# Allegro board route2.brd
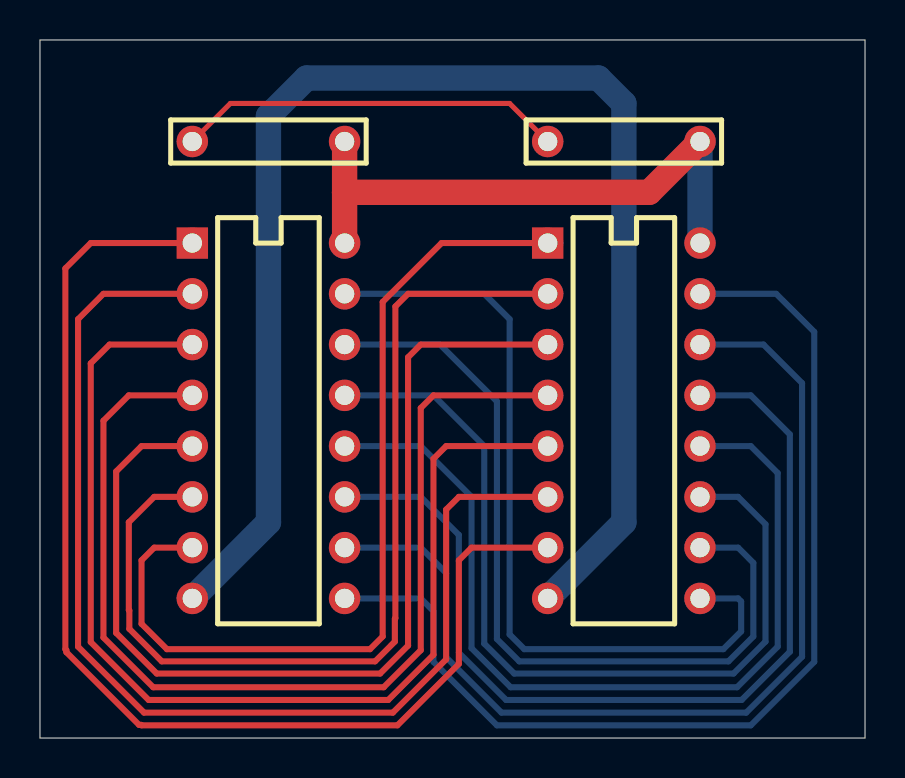
[diagram p0: board, top side]
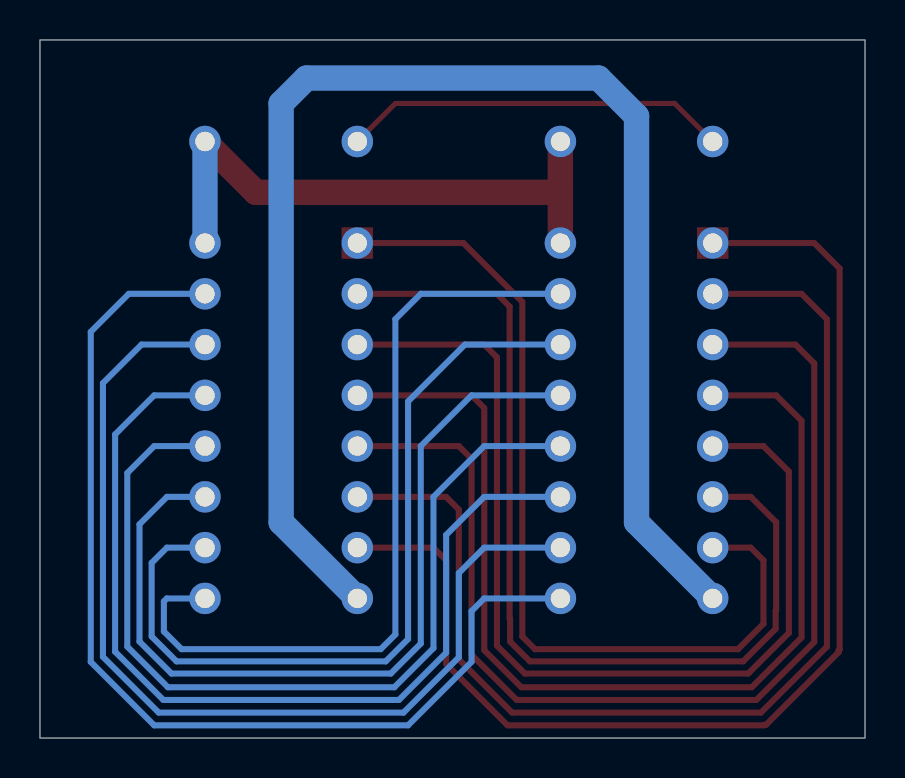
[diagram p1: board, bottom side, seen from below]

Outline 41.27 x 34.93 mm; copper layers: TOP, GND, POWER, INNER1, INNER2, BOTTOM. Coordinates in mm from the lower left corner of the outline.
Outline path: 0,34.93 41.27,34.93 41.27,0 0,0 0,34.93

## Design rules (mm)
nets with their own width: min track width 0.254; nets GND_SIGNAL
nets with their own width: min track width 0.305; nets N01899 N01900 N01901 N01902 N01903 N01904 N01905 N01906 N01907 N01908 N01909 N01910 N01911 N01912
nets with their own width: min track width 1.27; nets GND VCC

## Placement (name value [footprint] x y rotation side)
C1  CAP NP  [AC300100A]  15.24 29.85 180 top
C2  CAP NP  [AC300100A]  33.02 29.85 180 top
U1  74LS158  [DIP16]  7.62 24.77 270 top
U2  74LS158  [DIP16]  25.4 24.77 270 top

## Library data of the parts
C1 C2 = CAP_NP
U1 U2 = 74LS158

## Footprints (pads in the part's own frame, mm; a bottom-side part is the same pattern mirrored in y, then rotated)
AC300100A
  round 1.575 hole 0.965: 1(0,0) 2(7.62,0)
DIP16
  rect 1.575x1.575 hole 0.965: 1(0,0)
  round 1.575 hole 0.965: 2(2.54,0) 3(5.08,0) 4(7.62,0) 5(10.16,0) 6(12.7,0) 7(15.24,0) 8(17.78,0) 9(17.78,7.62) 10(15.24,7.62) 11(12.7,7.62) 12(10.16,7.62) 13(7.62,7.62) 14(5.08,7.62) 15(2.54,7.62) 16(0,7.62)

## Nets
GND: U1.8(TP-8) U2.8(TP-8)
GND_SIGNAL: C1.2(TP-2) C2.2(TP-2)
VCC: C1.1(TP-1) C2.1(TP-1) U1.16(TP-16) U2.16(TP-16)
N01899: U1.2(TP-2) U2.6(TP-6)
N01900: U1.3(TP-3) U2.5(TP-5)
N01901: U1.4(TP-4) U2.4(TP-4)
N01902: U1.5(TP-5) U2.3(TP-3)
N01903: U1.6(TP-6) U2.2(TP-2)
N01904: U1.7(TP-7) U2.1(TP-1)
N01905: U1.9(TP-9) U2.15(TP-15)
N01906: U1.10(TP-10) U2.14(TP-14)
N01907: U1.11(TP-11) U2.13(TP-13)
N01908: U1.12(TP-12) U2.12(TP-12)
N01909: U1.14(TP-14) U2.10(TP-10)
N01910: U1.1(TP-1) U2.7(TP-7)
N01911: U1.13(TP-13) U2.11(TP-11)
N01912: U1.15(TP-15) U2.9(TP-9)

## Routing (per net, layer and track width the routed paths; a pad name or vN(x,y) marks a point on that pad's centre or on a via; arc(x,y) is an arc through that point)
GND: length 71.1
  BOTTOM w1.27: U1.8 11.43,10.8 11.43,31.11 13.34,33.02 27.94,33.02 29.21,31.75 29.21,10.8 U2.8
GND_SIGNAL: length 19.4
  TOP w0.254: C1.2 9.53,31.75 23.5,31.75 C2.2
VCC: length 29
  TOP w1.27: C1.1 15.24,27.3 ; 15.24,27.3 30.48,27.3 C2.1 ; 15.24,27.3 U1.16
  BOTTOM w1.27: C2.1 U2.16
N01899: length 56.3
  TOP w0.305: U2.6 20.95,12.07 20.32,11.43 20.32,3.94 17.65,1.27 5.21,1.27 1.91,4.57 1.91,20.95 3.17,22.22 U1.2
N01900: length 54.5
  TOP w0.305: U1.3 3.48,19.68 2.54,18.75 2.54,4.8 5.44,1.91 17.42,1.91 19.68,4.17 19.68,13.97 20.32,14.61 U2.5
N01901: length 52.2
  TOP w0.305: U1.4 4.45,17.14 3.17,15.88 3.17,5.03 5.66,2.54 17.2,2.54 19.05,4.39 19.05,16.51 19.68,17.14 U2.4
N01902: length 50.1
  TOP w0.305: U2.3 19.05,19.68 18.41,19.05 18.41,4.62 17.02,3.23 5.84,3.23 3.81,5.26 3.81,13.34 5.08,14.61 U1.5
N01903: length 48.1
  TOP w0.305: U1.6 5.71,12.07 4.45,10.8 4.45,6.4 4.47,6.38 4.47,5.46 6.1,3.84 16.76,3.84 17.75,4.83 17.75,5.97 17.78,5.99 17.78,21.59 18.41,22.22 U2.2
N01904: length 45
  TOP w0.305: U2.1 20.09,24.77 17.14,21.82 17.14,5.08 16.51,4.45 6.35,4.45 5.08,5.72 5.08,8.89 5.71,9.52 U1.7
N01905: length 51.9
  BOTTOM w0.305: U1.9 19.05,6.99 19.68,6.35 19.68,3.81 22.86,0.64 35.56,0.64 38.73,3.81 38.73,20.32 36.83,22.22 U2.15
N01906: length 49.5
  BOTTOM w0.305: U1.10 19.05,9.52 20.32,8.25 20.32,4.04 23.09,1.27 35.33,1.27 38.13,4.06 38.13,17.75 36.2,19.68 U2.14
N01907: length 47.1
  BOTTOM w0.305: U2.13 35.56,17.14 37.52,15.19 37.52,4.32 35.1,1.91 23.32,1.91 20.95,4.27 20.95,10.16 19.05,12.07 U1.11
N01908: length 45.1
  BOTTOM w0.305: U1.12 19.05,14.61 21.59,12.07 21.59,4.5 23.55,2.54 34.87,2.54 36.91,4.57 36.91,13.26 35.56,14.61 U2.12
N01909: length 41.2
  BOTTOM w0.305: U1.14 20.02,19.68 22.86,16.84 22.86,4.95 23.98,3.84 34.44,3.84 35.69,5.08 35.69,8.76 34.92,9.52 U2.10
N01910: length 58.4
  TOP w0.305: U2.7 21.59,9.52 20.95,8.89 20.95,3.71 17.88,0.64 5.08,0.64 5.06,0.66 4.96,0.66 1.32,4.29 1.32,4.39 1.27,4.45 1.27,23.5 2.54,24.77 U1.1
N01911: length 43
  BOTTOM w0.305: U2.11 34.92,12.07 36.3,10.69 36.3,4.83 34.7,3.23 23.72,3.23 22.23,4.72 22.23,14.61 19.68,17.14 U1.13
N01912: length 40.4
  BOTTOM w0.305: U1.15 22.23,22.22 23.5,20.95 23.5,5.18 24.23,4.45 34.19,4.45 35.08,5.33 35.08,6.83 34.92,6.99 U2.9
